# Altium PCB PCB.PcbDoc
Units mm, origin at the board's own origin, x right, y up, seen from the top; angles counter-clockwise.
Board outline 16 x 16 mm, 2 copper layers (Top Layer, Bottom Layer), stack 1.621 mm thick; 5 components, 13 nets, 48 pads, 43 vias.
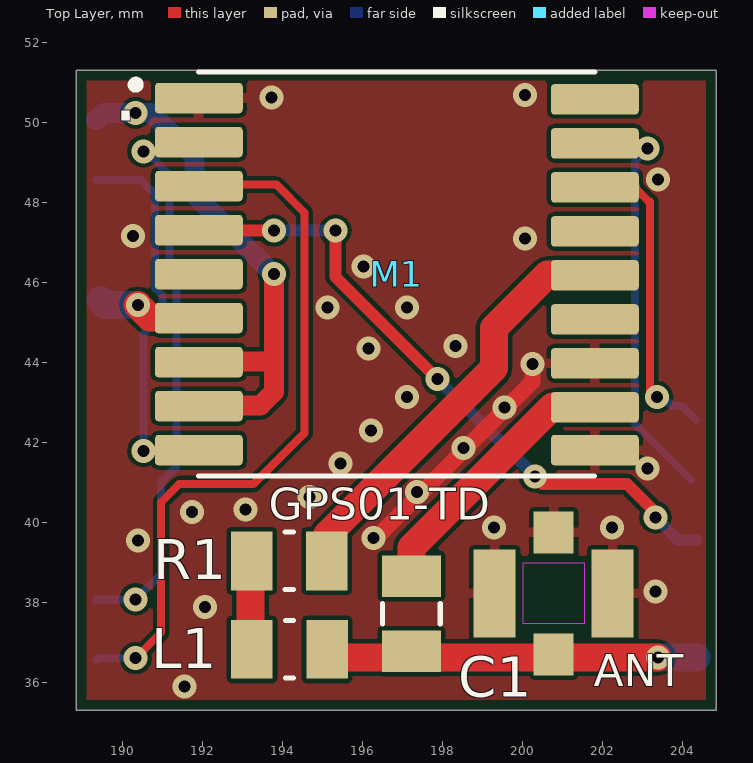
[diagram p0: Top Layer view]
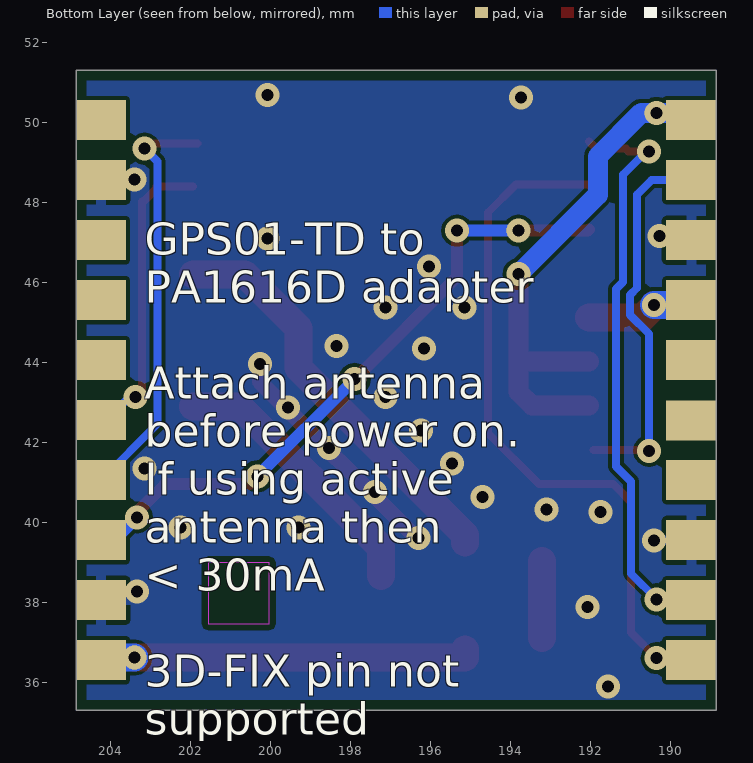
[diagram p1: Bottom Layer view, seen from below]
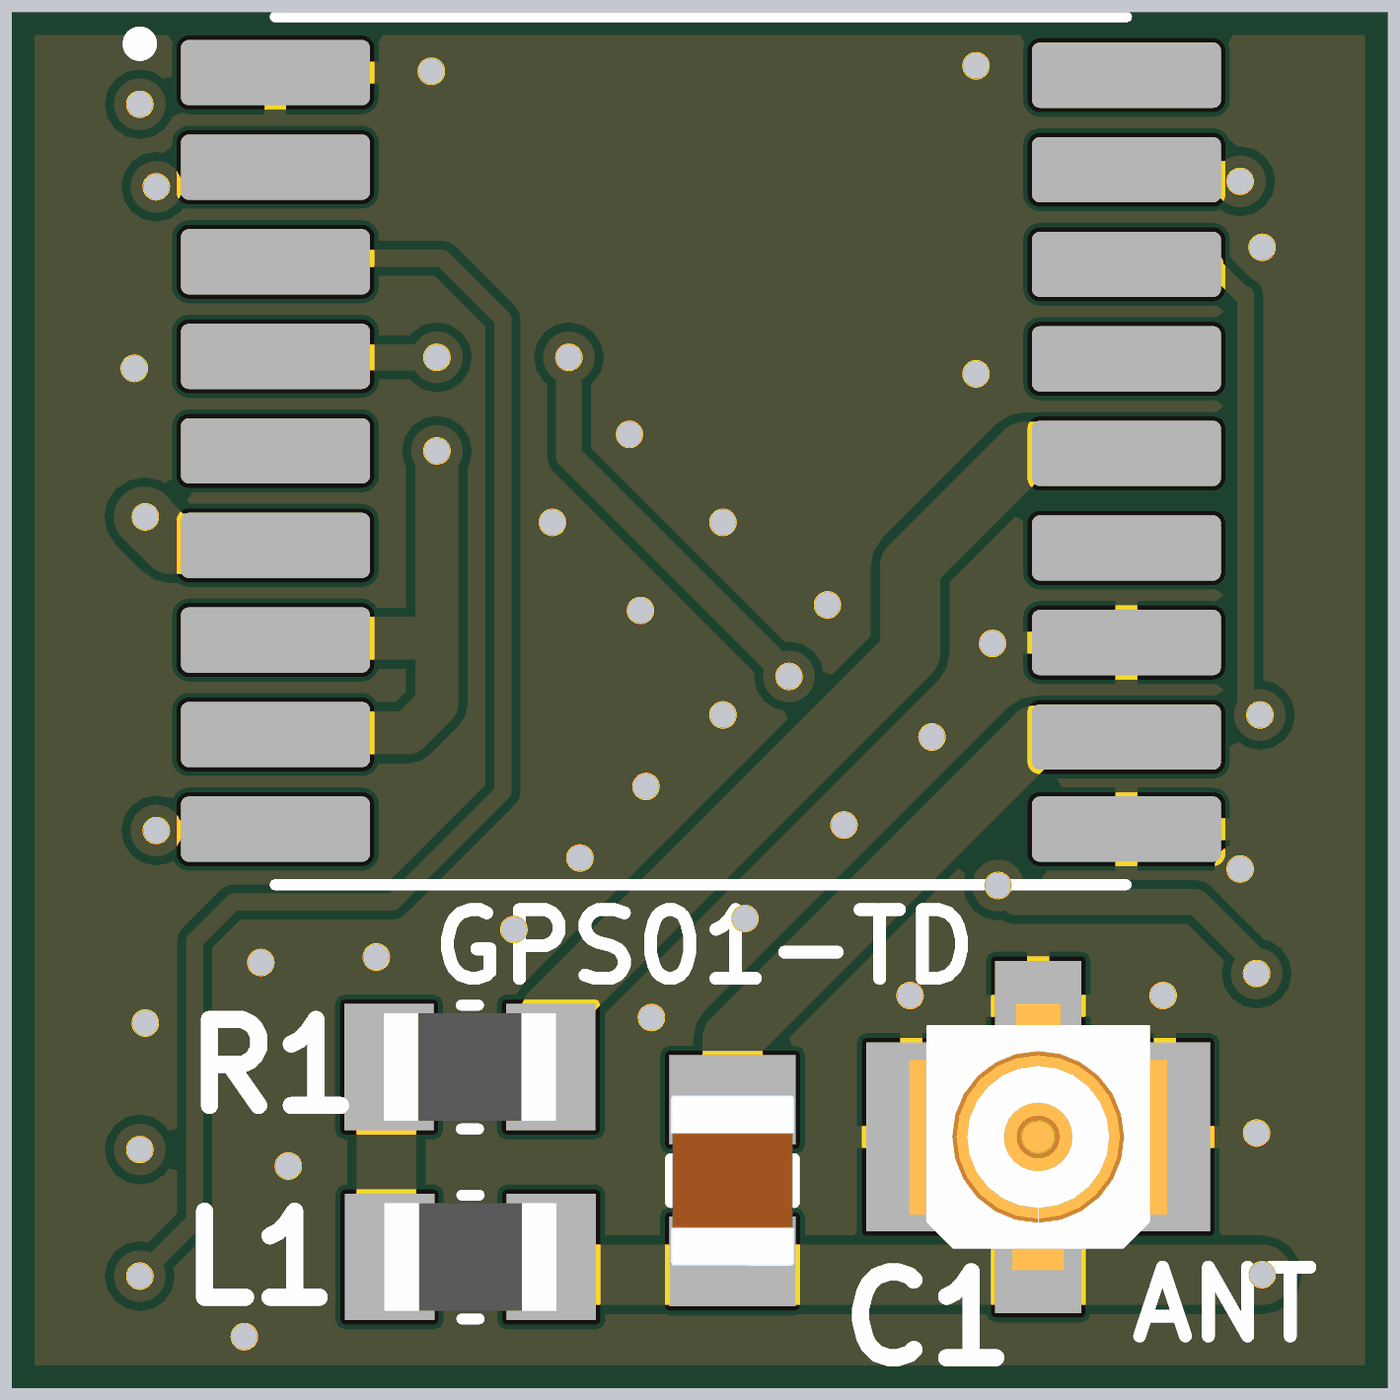
[diagram p2: 3D render of the assembled board from above, using the file's embedded part models]

## Layer stack, top to bottom
Top Solder: solder mask 0.0102, Solder Resist, Dk 3.5
Top Layer: signal copper 0.0356
Dielectric 1: dielectric 1.55, FR-4, Dk 4.8
Bottom Layer: signal copper 0.0356
Bottom Solder: solder mask 0.0102, Solder Resist, Dk 3.5

## Board outline
188.85,35.307 204.85,35.307 204.85,51.307 188.85,51.307

## Design rules (kind name [scope] priority, off if disabled: settings)
BoardOutlineClearance [All] p1: gap=0.254 ignorepadtopadclearanceinfootprint=FALSE except(0: Arc-SplitContinuation Track-SplitContinuation SMDPad-SplitContinuation THPad-SplitContinuation Via-SplitContinuation Fill-SplitContinuation Poly-SplitContinuation Region-SplitContinuation Text-SplitContinuation)
Clearance [All] p1: gap=0.152 ignorepadtopadclearanceinfootprint=FALSE except(0: Arc-Hole Track-Hole SMDPad-Hole THPad-Hole Via-Hole Fill-Hole Poly-Hole Region-Hole Text-Hole; 0.1: Arc-Poly Track-Poly SMDPad-Poly THPad-Poly Via-Poly Fill-Poly Poly-Poly)
HoleSize [All] p1: absolutevalues=TRUE maxlimit=6.2 minlimit=0.3 maxpercent=80.000 minpercent=20.000
MinimumSolderMaskSliver [All] p1: minsoldermaskwidth=0.1
PolygonConnect ViaConnect [IsVia] p1: connectstyle=Direct reliefconductorwidth=0.254 reliefentries=4 polygonreliefangle="90 Angle" airgapwidth=0.254
PolygonConnect [All] p2: connectstyle=Relief reliefconductorwidth=0.254 reliefentries=4 polygonreliefangle="90 Angle" airgapwidth=0.1
RoutingVias [All] p1: holewidth=0.3 width=0.6 viastyle="Through Hole" minholewidth=0.3 minwidth=0.5 maxholewidth=1 maxwidth=5
SilkToSilkClearance [All] p1: silktosilkclearance=0.1
SilkToSolderMaskClearance [IsPad] p1: minsilkscreentomaskgap=0.1 clearancetoexposedcopper=TRUE
SolderMaskExpansion [All] p1: expansion=0.051
Width [All] p1: maxlimit=25.4 minlimit=0.15 preferedwidth=0.3
26 further rules are at their usual default settings.

## Components (designator, comment, footprint, x,y, rotation, side; value= is the part's Value field where it differs from the comment)
ANT "CONMHF1-SMD-T" TE_CONMHF1-SMD-T 200.787,38.227 r180 top
C1 "47pF" CAPACITOR_0805_2012M-70N 197.231,37.719 r90 top
L1 "47nH" RESISTOR_0805_2012M-50N 194.183,36.83 r180 top
M1 "GPS01-TD" GPS01-TD 196.864,46.208 r0 top
R1 "10R" RESISTOR_0805_2012M-50N 194.176,39.04 r0 top

## Footprints (in the part's own frame and the unit in brackets; to place one, negate y for a bottom-side part, rotate by r counter-clockwise, add the part's x,y. Pads: shape width x height; smd on the part's side, far side on the other; paste and mask are expansions set on the pad)
CAPACITOR_0805_2012M-70N [mm] "Capacitor, 0805 (2012 metric), 0.7mm high, nominal pads,"
  rect 1.04x1.47 smd mask+0.051: 1(-0.94,0) 2(0.94,0)
  silkscreen extent -0.25,-0.72 0.25,0.72, body extent -1,-0.73 1,0.73, height 1.23
GPS01-TD [mm]
  rrect25% 2.2x0.76 smd: 1(-4.95,4.4) 2(-4.95,3.3) 3(-4.95,2.2) 4(-4.95,1.1) 5(-4.95,0) 6(-4.95,-1.1) 7(-4.95,-2.2) 8(-4.95,-3.3) 9(-4.95,-4.4) 10(4.95,-4.4) 11(4.95,-3.329) 12(4.95,-2.229) 13(4.95,-1.129) 14(4.95,-0.029) 15(4.95,1.071) 16(4.95,2.171) 17(4.95,3.271) 18(4.95,4.371)
  silkscreen extent -6.63,-5.05 4.95,5.05, body extent -4.95,-5.05 4.95,5.05, height 2
RESISTOR_0805_2012M-50N [mm] "Resistor, 0805 (2012 metric), nominal pads"
  rect 1.04x1.47 smd mask+0.051: 1(-0.94,0) 2(0.94,0)
  silkscreen extent -0.1,-0.72 0.1,0.72, body extent -1,-0.63 1,0.62, height 0.5
TE_CONMHF1-SMD-T [mm]
  rect 1x1.05 smd: 1(0,1.525) 4(0,-1.525)
  rect 1.05x2.2 smd: 2(-1.475,0) 3(1.475,0)
  Keep-Out Layer region: 0.762,-0.763 -0.762,-0.763 -0.762,0.761 0.762,0.761
  body extent -1.5,-1.55 1.5,1.55, height 1.31

## Part data
ANT: Package=None, Availability=Unavailable, MP=CONMHF1-SMD-T, Price=None
C1: library part "Generic Capacitor", "Passive - Capacitor, Generic", Tolerance=1%
L1: library part "Generic Inductor", "Passive - Inductor, Generic"
R1: library part "Generic Resistor", "Passive - Resistor, Generic", Tolerance=?%

## Free pads (board coordinates)
  rect 1.25x1 smd far side: 1(189.475,50.057) 2(189.475,48.557) 3(189.475,47.057) 4(189.475,45.557) 5(189.475,44.057) 6(189.474,42.545) 7(189.475,41.057) 8(189.475,39.557) 9(189.475,38.057) 10(189.475,36.557) 11(204.225,36.557) 12(204.225,38.057) 13(204.225,39.557) 14(204.225,41.057) 15(204.225,42.557) 16(204.225,44.057) 17(204.225,45.557) 18(204.225,47.057) 19(204.225,48.557) 20(204.225,50.057)

## Via types
v1: diameter 0.6, hole 0.3, Top Layer to Bottom Layer, tented both sides, 43 vias

## Nets (pads, with @x,y where several pads share a name; then routed paths per layer and width w, separated by ;. In a path a pad name is that pad's centre, name@x,y a point inside that pad or via, vN(x,y) a via of type N, cw(c..) or ccw(c..) an arc to the next point about the centre after c; other vN are vias at no path point)
1PPS: M1.4 pad.13 | length 16
  Top Layer w0.3: M1.4@192.027,47.328 192.059,47.296 v1(193.792,47.296) ; v1@195.2,47.232 195.328,47.232 195.328,46.144 v1(197.888,43.584) ; v1@200.512,40.96 202.624,40.96 203.392,40.192 v1(203.328,40.128)
  Bottom Layer w0.3: v1(193.792,47.296) v1@195.2,47.296 ; v1(197.888,43.584) v1(200.32,41.152) ; v1(203.328,40.128) 203.899,39.557 pad.13 pad.13@204.35,39.557
  other v1: 195.328,47.296
EXT_ANT: ANT.1 C1.1 L1.1 pad.11 | length 9.4
  Top Layer w0.7: L1.1 195.123,36.625 v1(203.392,36.625)
  Bottom Layer w0.7: v1(203.392,36.625) pad.11@204.352,36.625
GND: ANT.2 ANT.3 ANT.4 M1.1 M1.10 M1.12 pad.3 pad.8 pad.12 pad.19 | length 6
  Top Layer w0.4: v1@196.352,39.616 200.256,43.52 v1(200.256,43.968)
  other v1: 191.552,35.904 192.064,37.888 203.328,38.272 190.4,39.552 196.288,39.616 199.296,39.872 202.24,39.872 191.744,40.256 193.088,40.32 194.688,40.64 197.376,40.768 203.136,41.344 195.456,41.472 198.528,41.856 196.224,42.304 199.552,42.88 197.12,43.136 196.16,44.352 198.336,44.416 195.136,45.376 197.12,45.376 196.032,46.4 200.064,47.104 190.272,47.168 203.392,48.576 193.728,50.624 200.064,50.688
NetC1_2: C1.2 M1.11 | length 6.9
  Top Layer w0.7: C1.2 197.231,39.37 200.76,42.899 M1.11@201.927,42.899
NetL1_2: L1.2 R1.1 | length 1.9
  Top Layer w0.7: L1.2@193.206,37.114 R1.1@193.206,39.04
NetM1_14: M1.14 R1.2 | length 10.3
  Top Layer w0.7: R1.2@195.123,39.497 195.123,39.684 199.296,43.857 199.296,44.864 200.631,46.199 M1.14@201.927,46.199
NRESET: M1.9 pad.2 | length 9.7
  Top Layer w0.2: v1@190.512,41.808 M1.9
  Bottom Layer w0.2: pad.2@189.35,48.557 pad.2 190.464,48.557 190.824,48.197 190.824,45.868 191.002,45.69 191.002,45.19 190.528,44.716 v1(190.528,41.792)
Rx: M1.3 pad.10 | length 17.8
  Top Layer w0.2: v1(190.336,36.608) 190.976,37.248 190.976,40.512 191.424,40.96 193.28,40.96 194.56,42.24 194.56,47.744 193.856,48.448 192.047,48.448 M1.3@192.027,48.428
  Bottom Layer w0.2: pad.10@189.35,36.557 189.401,36.608 v1(190.336,36.608)
SCL: M1.17 pad.14 | length 10.9
  Top Layer w0.2: M1.17 203.257,49.479 203.136,49.357 v1(203.136,49.344)
  Bottom Layer w0.2: v1@203.328,49.408 203.264,49.344 v1(203.136,49.344) 202.814,49.022 202.814,42.468 pad.14
SDA: M1.16 pad.15 | length 7.6
  Top Layer w0.2: M1.16@201.927,48.399 202.838,48.399 202.84,48.397 202.84,48.347 203.163,48.024 203.2,48.024 203.2,43.302 v1(203.366,43.136)
  Bottom Layer w0.2: v1(203.366,43.136) 203.52,43.136 203.744,42.912 203.995,42.912 pad.15@204.35,42.557
Tx: M1.2 pad.9 | length 15
  Top Layer w0.2: v1@190.336,49.28 v1(190.528,49.28) 191.04,49.28 191.104,49.344 191.843,49.344 M1.2@192.027,49.528
  Bottom Layer w0.2: pad.9@189.35,38.057 189.373,38.08 v1(190.336,38.08) 190.976,38.72 190.976,41.024 191.355,41.403 191.355,45.835 191.177,46.013 191.177,48.695 190.592,49.28 v1(190.528,49.28) v1@190.336,49.28
VBAK: M1.6 pad.4 | length 2.8
  Top Layer w0.7: v1(190.4,45.44) 190.383,45.44 190.695,45.128 M1.6@192.027,45.128
  Bottom Layer w0.7: pad.4@189.454,45.557 189.571,45.44 v1(190.4,45.44)
VCC: M1.7 M1.8 pad.1 | length 13.4
  Top Layer w0.5: M1.8@192.027,42.928 193.456,42.928 193.792,43.264 193.792,44.032 ; M1.7@192.027,44.028 193.788,44.028 193.792,44.032 ; v1(193.792,46.208) 193.792,44.032
  Bottom Layer w0.5: pad.1@189.35,50.057 189.533,50.24 v1(190.336,50.24) 190.72,50.24 191.808,49.152 191.808,48.192 v1(193.792,46.208)
pads on no net: M1.5 M1.13 M1.15 M1.18

## Polygon pours and split planes (outlines as drawn)
GND on Top Layer "GND" (solid, pour order 6): 188.864,51.328 204.85,51.328 204.85,35.307 188.864,35.307
GND on Bottom Layer "GND_BOTTOM" (solid, pour order 4): 188.845,51.347 204.85,51.347 204.85,35.307 188.845,35.307

## Silkscreen, mask and mechanical layers (free items; w line width, h text height)
Top Overlay:
  text "." at 189.76,50.048 h1.5
  text "GPS01-TD" at 193.664,40.064 h0.8
Bottom Overlay:
  text "GPS01-TD to / PA1616D adapter  /  / Attach antenna  / before power on. / If using active  / antenna then / < 30mA /  / 3D-FIX pin not  / supported" at 203.136,34.688 h0.8
Board Outline:
  the board outline again, w0.25